# EAGLE board supply (EAGLE 9.6.2)
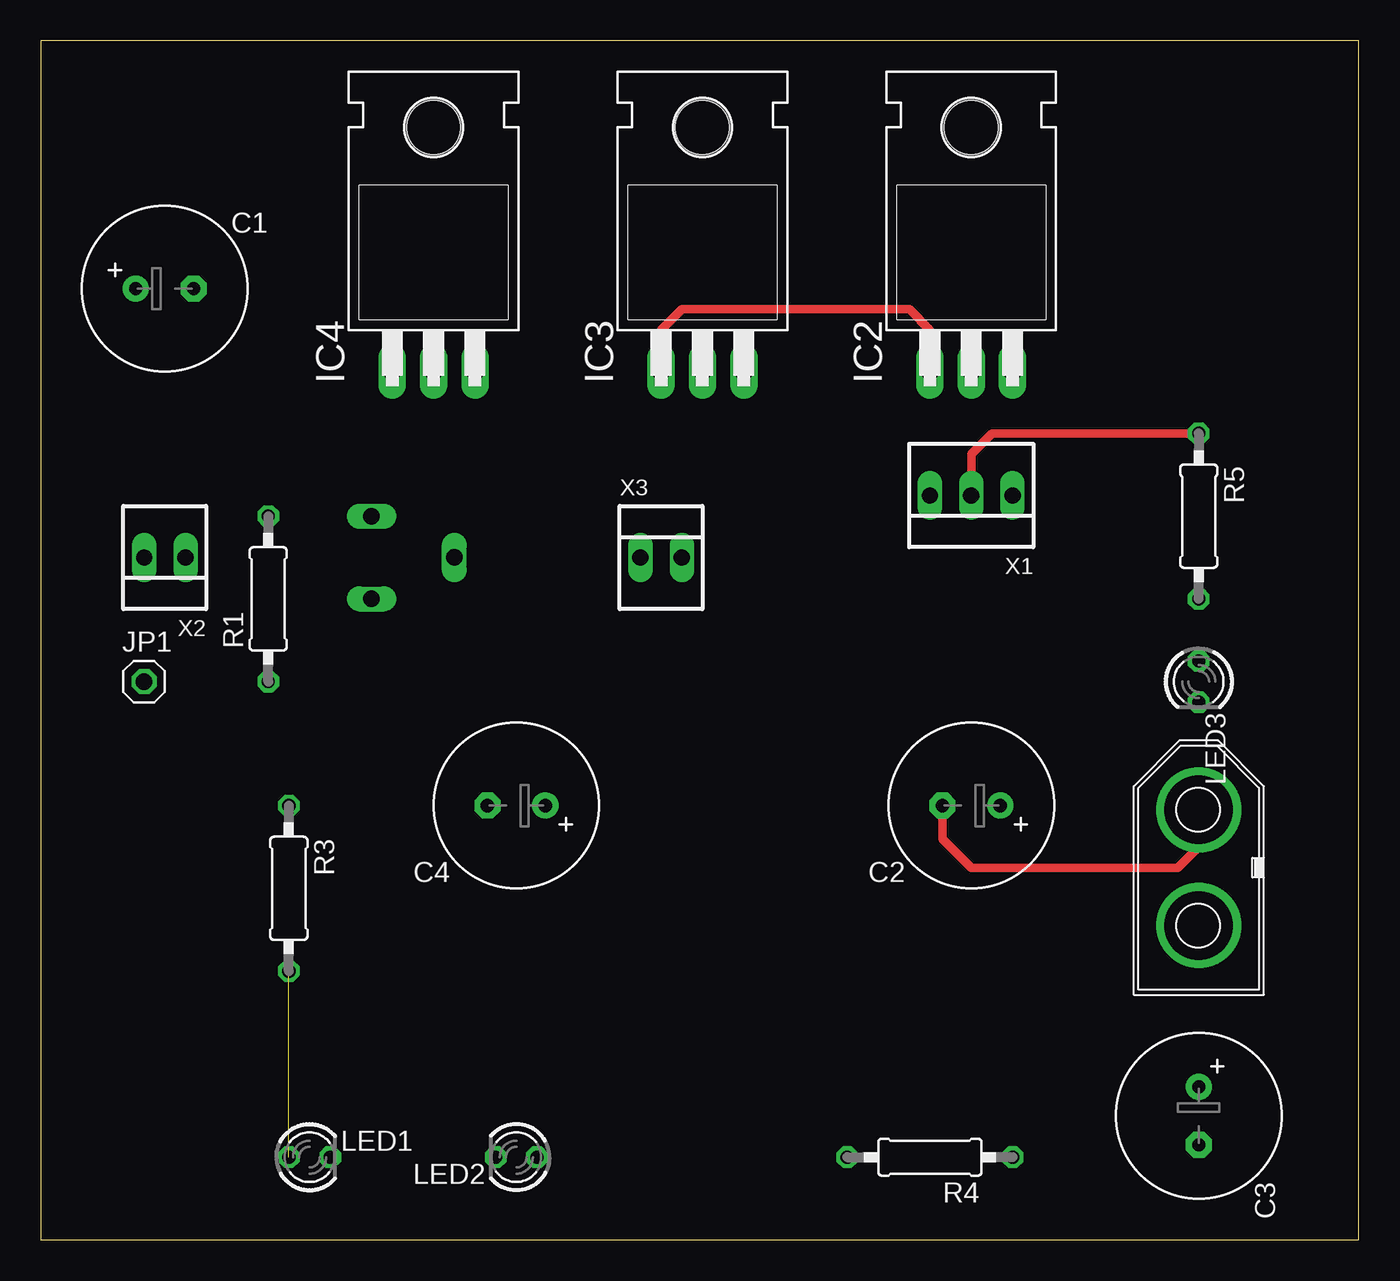
[diagram p0: board, top side]
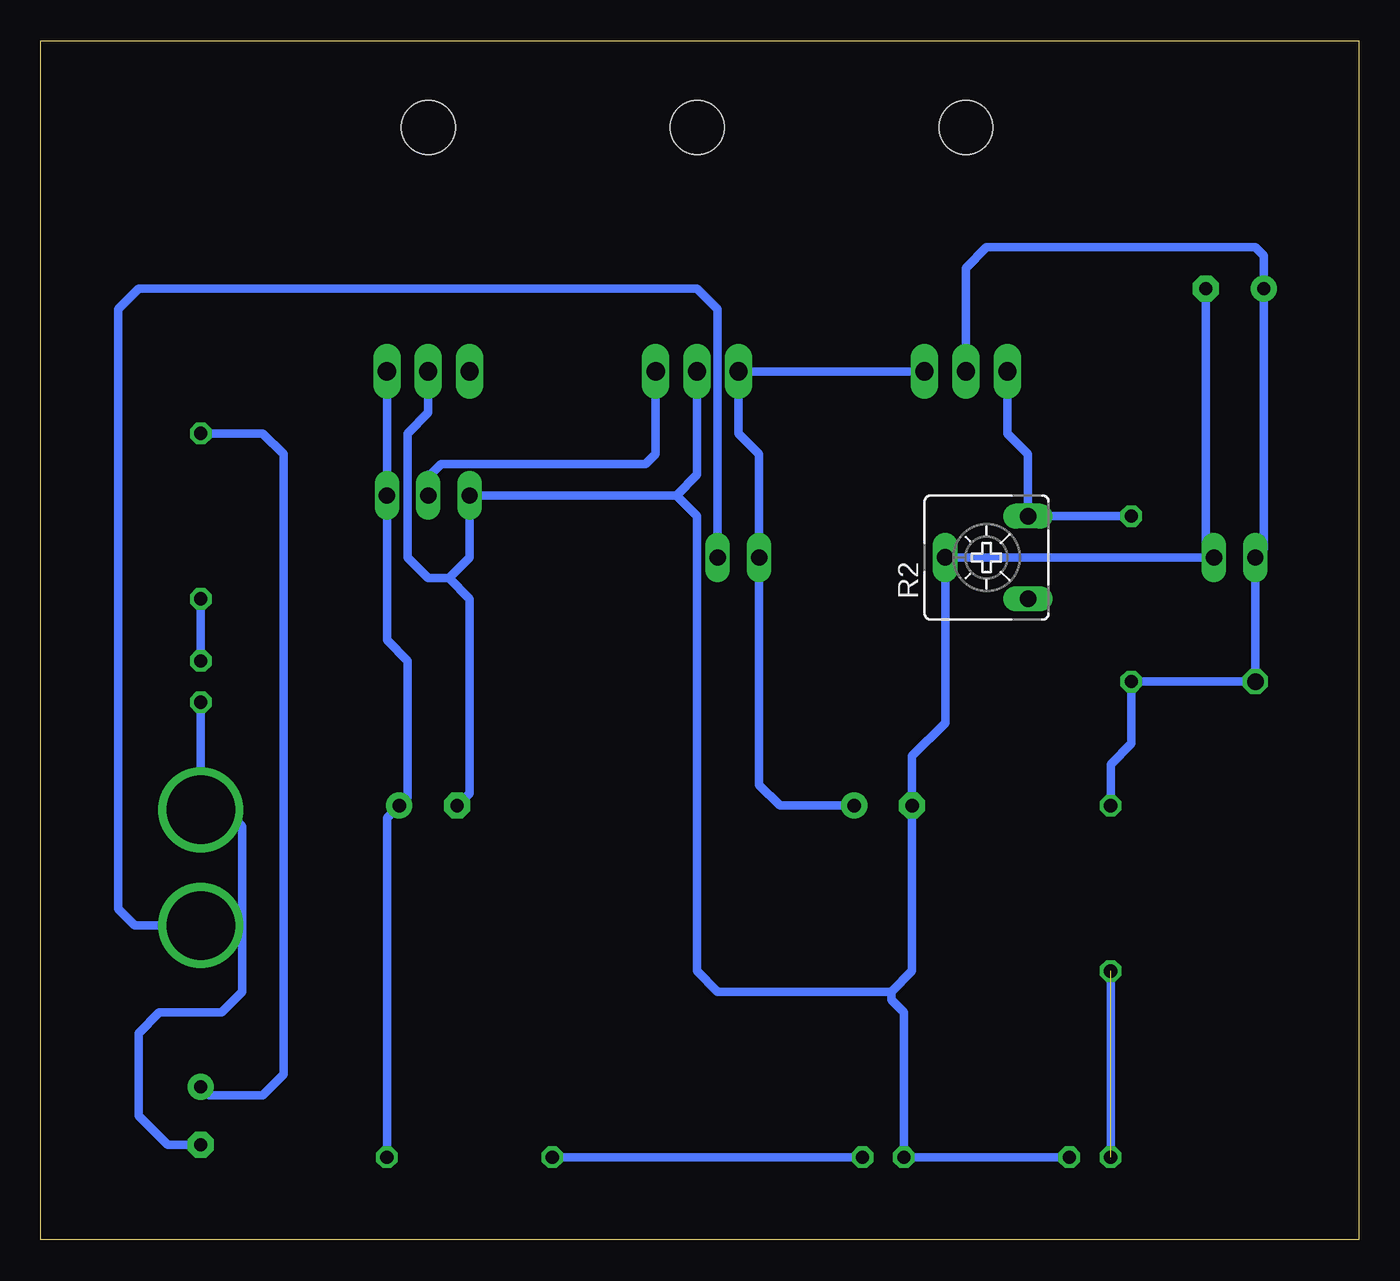
[diagram p1: board, bottom side, seen from below]

Size 80.95 x 73.65 mm. Coordinates in mm from the lower left corner, seen from the top.
Outline: 0,0 80.95,0 80.95,73.65 0,73.65 0,0
Copper layers (1*16): Top 0.035mm / dielectric 1.5mm / Bottom 0.035mm
Design rules "default": minimum track width 6mil, minimum drill 0.35mm, track to track 6mil, track to pad 6mil, pad to pad 6mil, via to via 6mil, smd to smd 6mil, copper to edge 40mil, drill to drill 6mil, minimum pad ring 10mil, minimum via ring 8mil, stop-mask expansion 4mil, vias tented up to drill 0mil, thermal gap 10mil

## Footprints (pad centres in the part's own frame; a part is rotated, then mirrored left to right if it is on the bottom)
E3,5-10 = drill 0.813 pad 1.6: + -1.778,0 | drill 0.813 pad 1.6 octagon: - 1.778,0
TO220H = drill 1.118 long: 1 -2.54,-10.16; 2 0,-10.16; 3 2.54,-10.16 | hole 3.302: 0,4.826
1X01 = drill 1.016 octagon: 1 0,0
LED3MM = drill 0.813 octagon: A -1.27,0; K 1.27,0
0207/10 = drill 0.813 octagon: 1 -5.08,0; 2 5.08,0
CA6V = drill 1.016 long: A -2.54,-2.54; E 2.54,-2.54; S 0,2.54
CON-XT60M = drill 4.2: V+ -3.55,0; V- 3.55,0
22-23-2031 = drill 1 long: 1 -2.54,0; 2 0,0; 3 2.54,0
22-23-2021 = drill 1 long: 1 -1.27,0; 2 1.27,0

## Placement (x,y rotation side)
C1  1000uF/16V  [E3,5-10]  7.62,58.42 0 top
C2  1000uF/16V  [E3,5-10]  57.15,26.67 180 top
C3  1000uF/16V  [E3,5-10]  71.12,7.62 270 top
C4  1000uF/16V  [E3,5-10]  29.21,26.67 180 top
IC2  7805T  [TO220H]  57.15,63.5 0 top
IC3  7805T  [TO220H]  40.64,63.5 0 top
IC4  317T  [TO220H]  24.13,63.5 0 top
JP1  [1X01]  6.35,34.29 0 top
LED1  [LED3MM]  16.51,5.08 0 top
LED2  [LED3MM]  29.21,5.08 180 top
LED3  [LED3MM]  71.12,34.29 270 top
R1  1K2  [0207/10]  13.97,39.37 90 top
R2  20K  [CA6V]  22.86,41.91 90 bottom
R3  1K  [0207/10]  15.24,21.59 270 top
R4  1K  [0207/10]  54.61,5.08 180 top
R5  1K  [0207/10]  71.12,44.45 270 top
VIN  [CON-XT60M]  71.12,22.86 90 top
X1  VSYS  [22-23-2031]  57.15,45.72 180 top
X2  VMOT  [22-23-2021]  7.62,41.91 180 top
X3  switch  [22-23-2021]  38.1,41.91 0 top

## Library data of the parts
C1-C4 R1 R3-R5 = rcl
IC2-IC4 = linear
JP1 = pinhead
LED1-LED3 = led
R2 = pot
VIN = con-XT60M
X1 = con-molex; MF: MOLEX; MPN: 22-23-2031; OC_FARNELL: 1462950; OC_NEWARK: 30C0862
X2 X3 = con-molex; MF: MOLEX; MPN: 22-23-2021; OC_FARNELL: 1462926; OC_NEWARK: 25C3832

## Nets
+12V: C3.+ IC3.3 R5.1 X1.2
GND: C1.- C2.- C3.- C4.- IC2.2 IC3.2 LED1.K LED2.K LED3.K R2.S VIN.V- X1.3 X2.1
N$1: IC4.1 R1.2 R2.E
N$2: LED1.A R3.2
N$3: LED3.A R5.2
N$4: VIN.V+ X3.2
N$5: LED2.A R4.2
VCC: C2.+ IC2.3 R4.1 X1.1
VDD: C1.+ IC4.2 JP1.1 R1.1 R3.1 X2.2
VPP: C4.+ IC2.1 IC3.1 IC4.3 X3.1

## Tracks (layer width: path | path; a pad name or v marks a point on that pad's centre or on a via)
+12V
  Top 0.508: X1.2 57.15,48.26 58.42,49.53 R5.1
  Bottom 0.508: IC3.3 43.18,48.26 43.81,47.63 56.36,47.63 57.01,46.99 57.15,46.99 X1.2 | C3.+ 70.61,8.89 67.31,8.89 66.04,10.16 66.04,48.26 67.31,49.53 R5.1
GND
  Top 0.508: C2.- 55.37,24.64 57.15,22.86 69.85,22.86 71.12,24.13 VIN.V-
  Bottom 0.508: C1.- 9.4,42.42 X2.1 R2.S 25.4,31.75 27.43,29.72 C4.- 27.43,16.51 28.7,15.24 | LED3.K VIN.V- 70.11,26.41 69.85,26.67 68.58,25.4 68.58,15.24 69.85,13.97 73.66,13.97 74.93,12.7 74.93,7.62 73.15,5.84 C3.- | IC3.2 40.64,46.99 41.91,45.72 | 41.91,45.72 X1.3 54.61,41.91 55.88,40.64 | LED1.K LED2.K 27.94,13.97 28.7,14.73 28.7,15.24 | C2.- 54.61,27.43 54.61,39.37 55.88,40.64 | 41.91,45.72 40.64,44.45 40.64,16.51 39.37,15.24 28.7,15.24 | IC2.2 57.15,50.8 58.42,49.53 58.42,41.91 57.15,40.64 55.88,40.64
N$1
  Bottom 0.508: IC4.1 21.59,49.53 20.32,48.26 R2.E R1.2
N$2  (1 unrouted)
  Bottom 0.508: LED1.A R3.2
N$3
  Bottom 0.508: R5.2 LED3.A
N$4
  Bottom 0.508: X3.2 39.37,57.15 40.64,58.42 74.93,58.42 76.2,57.15 76.2,20.32 75.19,19.31 VIN.V+
N$5
  Bottom 0.508: LED2.A R4.2
VCC
  Bottom 0.508: IC2.3 X1.1 59.69,36.83 58.42,35.56 58.42,27.18 C2.+ 59.69,25.91 R4.1
VDD
  Bottom 0.508: IC4.2 24.13,59.69 22.86,60.96 6.35,60.96 5.84,60.45 C1.+ 5.84,42.42 X2.2 JP1.1 R1.1 13.97,30.48 15.24,29.21 R3.1
VPP
  Top 0.508: IC3.1 38.1,55.88 39.37,57.15 53.34,57.15 54.61,55.88 IC2.1
  Bottom 0.508: IC4.3 IC3.1 38.1,49.53 36.83,48.26 X3.1 36.83,27.94 35.56,26.67 C4.+